# Altium PCB SkinHearing_electrodes.PcbDoc
Units mm, origin at the board's own origin, x right, y up, seen from the top; angles counter-clockwise.
Board outline 235.08 x 33.5 mm, 2 copper layers (Top Layer, Bottom Layer); 7 components, 25 nets, 92 pads, 0 vias.
Unrouted connection lines stored in the file: 6.
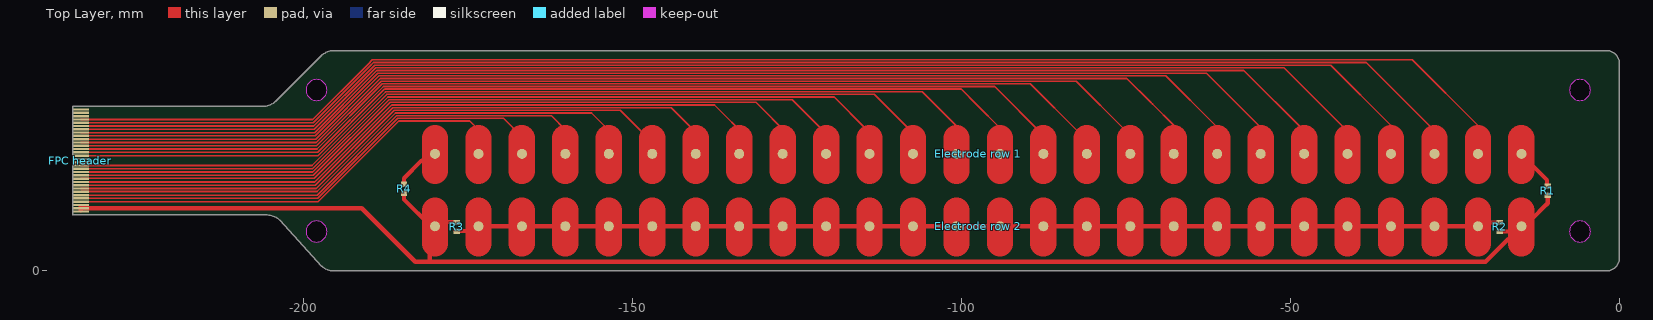
[diagram p0: Top Layer view]
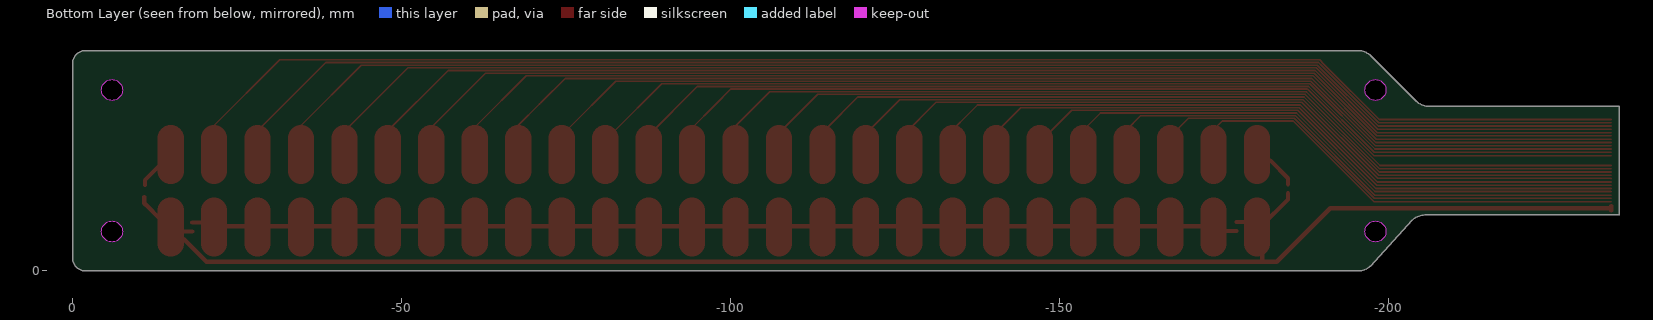
[diagram p1: Bottom Layer view, seen from below]
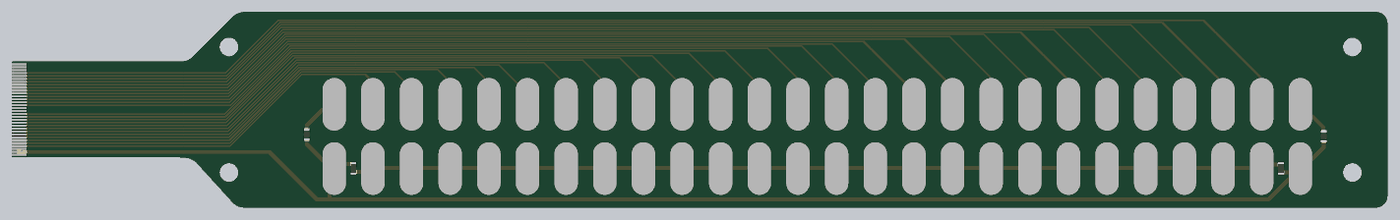
[diagram p2: 3D render of the assembled board from above, using the file's embedded part models]

## Layer stack, top to bottom
Top Solder: solder mask 0.0102, Solder Resist, Dk 3.5
Top Layer: signal copper 0.0356
Dielectric 1: dielectric 0.32, FR-4, Dk 4.8
Bottom Layer: signal copper 0.0356
Bottom Solder: solder mask 0.0102, Solder Resist, Dk 3.5

## Board outline
-234.98,8.516 -205.509,8.516 -205.509,8.52 cw(c-205.621,5.522) -203.6,7.739 -197.205,0.695 -197.209,0.7 ccw(c-195.28,2.998) -195.385,0 -2,0 ccw(c-2,2) 0,2 0,31.5 ccw(c-2,31.5) -2,33.5 -195.4,33.5 ccw(c-195.261,30.503) -197.302,32.702 -197.3,32.7 -204.2,25.8 -204.198,25.798 cw(c-206.239,27.997) -205.9,25.016 -234.98,25.016 ccw(c-234.98,24.916) -235.08,24.916 -235.08,8.616 ccw(c-234.98,8.616)
cut-out: -199.6,6 ccw(c-198,6) -198,4.4 ccw(c-198,6) -196.4,6 ccw(c-198,6) -198,7.6 ccw(c-198,6)
cut-out: -7.6,6 ccw(c-6,6) -6,4.4 ccw(c-6,6) -4.4,6 ccw(c-6,6) -6,7.6 ccw(c-6,6)
cut-out: -199.6,27.5 ccw(c-198,27.5) -198,25.9 ccw(c-198,27.5) -196.4,27.5 ccw(c-198,27.5) -198,29.1 ccw(c-198,27.5)
cut-out: -7.6,27.5 ccw(c-6,27.5) -6,25.9 ccw(c-6,27.5) -4.4,27.5 ccw(c-6,27.5) -6,29.1 ccw(c-6,27.5)

## Design rules (kind name [scope] priority, off if disabled: settings)
Clearance [All] p1: gap=0.15 ignorepadtopadclearanceinfootprint=FALSE except(0: Arc-Hole Track-Hole SMDPad-Hole THPad-Hole Via-Hole Fill-Hole Poly-Hole Region-Hole Text-Hole)
ComponentClearance [All] p1: gap=0 collisioncheckmode=3 verticalgap=0 showdistances=FALSE
PolygonConnect [All] p1: connectstyle=Relief reliefconductorwidth=0.254 reliefentries=4 polygonreliefangle="90 Angle" airgapwidth=0.254
RoutingVias [All] p1: holewidth=0.711 width=1.27 viastyle="Through Hole" minholewidth=0.711 minwidth=1.27 maxholewidth=0.711 maxwidth=1.27
SolderMaskExpansion [All] p1: expansion=0.102
Width [All] p1: maxlimit=5 minlimit=0.254 preferedwidth=0.254
29 further rules are at their usual default settings.

## Components (designator, comment, footprint, x,y, rotation, side; value= is the part's Value field where it differs from the comment)
"Electrode row 1" "Skinhearing_electrode_bar" "Skinhearing_electrode bar"#1 -180,17.8 r0 top
"Electrode row 2" "Skinhearing_electrode_bar" "Skinhearing_electrode bar"#2 -180,6.8 r0 top
"FPC header" "FPC_header_XF2M-3215-1A" FPC_XF2M-3215-1A -233.83,16.782 r90 top
R1 "R" R0603 -10.9,12.2 r90 top value=0R
R2 "R" R0603 -18.2,6.7 r90 top value=0R
R3 "R" R0603 -176.7,6.7 r90 top value=0R
R4 "R" R0603 -184.7,12.5 r90 top value=0R

## Footprints (in the part's own frame and the unit in brackets; to place one, negate y for a bottom-side part, rotate by r counter-clockwise, add the part's x,y. Pads: shape width x height; smd on the part's side, far side on the other; paste and mask are expansions set on the pad)
FPC_XF2M-3215-1A [mm] "FPC template for XF2M-3215-1A 32pin connector"
  rect 0.35x2.5 smd: 1(-7.75,0) 2(-7.25,0) 3(-6.75,0) 4(-6.25,0) 5(-5.75,0) 6(-5.25,0) 7(-4.75,0) 8(-4.25,0) 9(-3.75,0) 10(-3.25,0) 11(-2.75,0) 12(-2.25,0) 13(-1.75,0) 14(-1.25,0) 15(-0.75,0) 16(-0.25,0) 17(0.25,0) 18(0.75,0) 19(1.25,0) 20(1.75,0) 21(2.25,0) 22(2.75,0) 23(3.25,0) 24(3.75,0) 25(4.25,0) 26(4.75,0) 27(5.25,0) 28(5.75,0) 29(6.25,0) 30(6.75,0) 31(7.25,0) 32(7.75,0)
R0603 [mm]
  rect 0.8x0.95 smd: 1(-0.675,0) 2(0.675,0)
  body extent -0.87,-0.48 0.87,0.48, height 0.45
"Skinhearing_electrode bar"#1 [mil]
  round 60 smd: 1(0,0) 2(260,0) 3(520,0) 4(780,0) 5(1040,0) 6(1300,0) 7(1560,0) 8(1820,0) 9(2080,0) 10(2340,0) 11(2600,0) 12(2860,0) 13(3120,0) 14(3380,0) 15(3640,0) 16(3900,0) 17(4160,0) 18(4420,0) 19(4680,0) 20(4940,0) 21(5200,0) 22(5460,0) 23(5720,0) 24(5980,0) 25(6240,0) 26(6500,0)
  Top Layer lines w157.48: 0,-103 0,0 0,93.85 ; 260,-103 260,0 260,74.17 260,74.64 260,93.85 ; 520,-103 520,0 520,93.85 ; 780,-103 780,0 780,90.08 780,93.85 ; 1040,-103 1040,0 1040,93.85 ; 1300,-103 1300,0 1300,93.85 ; 1560,-103 1560,0 1560,93.85 ; 1820,-103 1820,0 1820,93.85 ; 2080,-103 2080,0 2080,93.85 ; 2340,-103 2340,0 2340,93.85 ; 2600,-103 2600,0 2600,93.85 ; 2860,-103 2860,0 2860,93.85 ; 3120,-103 3120,0 3120,93.85 ; 3380,-103 3380,0 3380,93.85 ; 3640,-103 3640,0 3640,93.85 ; 3900,-103 3900,0 3900,93.85 ; 4160,-103 4160,0 4160,93.85 ; 4420,-103 4420,0 4420,93.85 ; 4680,-103 4680,0 4680,93.85 ; 4940,-103 4940,0 4940,93.85 ; 5200,-103 5200,0 5200,93.85 ; 5460,-103 5460,0 5460,93.85 ; 5720,-103 5720,0 5720,79.21 5720,93.85 ; 5980,-103 5980,0 5980,86.93 5980,93.85 ; 6240,-103 6240,0 6240,93.85 ; 6500,-103 6500,-43.31 6500,0 6500,93.85
"Skinhearing_electrode bar"#2 [mil]
  round 60 smd: 1(0,0) 2(260,0) 3(520,0) 4(780,0) 5(1040,0) 6(1300,0) 7(1560,0) 8(1820,0) 9(2080,0) 10(2340,0) 11(2600,0) 12(2860,0) 13(3120,0) 14(3380,0) 15(3640,0) 16(3900,0) 17(4160,0) 18(4420,0) 19(4680,0) 20(4940,0) 21(5200,0) 22(5460,0) 23(5720,0) 24(5980,0) 25(6240,0) 26(6500,0)
  Top Layer lines w157.48: 0,-103 0,0 0,3.94 0,25.59 0,93.85 ; 260,-103 260,0 ; 260,93.85 260,0 ; 520,-103 520,0 ; 520,93.85 520,0 ; 780,-103 780,0 ; 780,93.85 780,0 ; 1040,-103 1040,0 ; 1040,93.85 1040,0 ; 1300,-103 1300,0 ; 1300,93.85 1300,0 ; 1560,-103 1560,0 ; 1560,93.85 1560,0 ; 1820,-103 1820,0 ; 1820,93.85 1820,0 ; 2080,-103 2080,0 ; 2080,93.85 2080,0 ; 2340,-103 2340,0 ; 2340,93.85 2340,0 ; 2600,-103 2600,0 ; 2600,93.85 2600,0 ; 2860,-103 2860,0 ; 2860,93.85 2860,0 ; 3120,-103 3120,0 ; 3120,93.85 3120,0 ; 3380,-103 3380,0 ; 3380,93.85 3380,0 ; 3640,-103 3640,0 ; 3640,93.85 3640,0 ; 3900,-103 3900,0 ; 3900,93.85 3900,0 ; 4160,-103 4160,0 ; 4160,93.85 4160,0 ; 4420,-103 4420,0 ; 4420,93.85 4420,0 ; 4680,-103 4680,0 ; 4680,93.85 4680,0 ; 4940,-103 4940,0 ; 4940,93.85 4940,0 ; 5200,-103 5200,0 ; 5200,93.85 5200,0 ; 5460,-103 5460,0 ; 5460,93.85 5460,0 ; 5720,-103 5720,0 ; 5720,93.85 5720,0 ; 5980,-103 5980,0 ; 5980,93.85 5980,0 ; 6240,-103 6240,0 6240,26.57 6240,93.85 ; 6500,-103 6500,-21.65 6500,0 6500,55.12 6500,93.85 ; 260,0 260,0 ; 520,0 520,0 ; 780,0 780,0 ; 1040,0 1040,0 ; 1300,0 1300,0 ; 1560,0 1560,0 ; 1820,0 1820,0 ; 2080,0 2080,0 ; 2340,0 2340,0 ; 2600,0 2600,0 ; 2860,0 2860,0 ; 3120,0 3120,0 ; 3380,0 3380,0 ; 3640,0 3640,0 ; 3900,0 3900,0 ; 4160,0 4160,0 ; 4420,0 4420,0 ; 4680,0 4680,0 ; 4940,0 4940,0 ; 5200,0 5200,0 ; 5460,0 5460,0 ; 5720,0 5720,0 ; 5980,0 5980,0

## Part data
R1 R2 R3 R4: "Resistor SMD"

## Nets (pads, with @x,y where several pads share a name; then routed paths per layer and width w, separated by ;. In a path a pad name is that pad's centre, name@x,y a point inside that pad or via, vN(x,y) a via of type N, cw(c..) or ccw(c..) an arc to the next point about the centre after c; other vN are vias at no path point)
CH1: "Electrode row 1.2" "FPC header.4" | length 69.7
  Top Layer w0.254: -233.83,10.532 -197.768,10.532 -185.504,22.796 -174.696,22.796 -173.396,21.496 -173.396,20.184 -173.396,19.696 -173.396,19.684 -173.396,17.8
CH2: "Electrode row 1.3" "FPC header.5" | length 75.8
  Top Layer w0.254: -233.83,11.032 -197.839,11.032 -185.671,23.2 -169.6,23.2 -166.792,20.392 -166.792,20.184 -166.792,17.8
CH3: "Electrode row 1.4" "FPC header.6" | length 81.9
  Top Layer w0.254: -233.83,11.532 -197.911,11.532 -185.839,23.604 -162.304,23.604 -160.188,21.488 -160.188,20.184 -160.188,20.088 -159.5,19.4
CH4: "Electrode row 1.5" "FPC header.7" | length 87.8
  Top Layer w0.254: -233.83,12.032 -233.782,12.08 -197.934,12.08 -186.006,24.008 -156.208,24.008 -152.55,20.35
CH5: "Electrode row 1.6" "FPC header.8" | length 92.6
  Top Layer w0.254: -233.83,12.532 -198.053,12.532 -186.173,24.412 -151.823,24.412 -147.822,20.411
CH6: "Electrode row 1.7" "FPC header.9" | length 100.2
  Top Layer w0.254: -233.83,13.032 -198.182,13.032 -186.398,24.816 -144.116,24.816 -141.281,21.981 -141.281,20.411
CH7: "Electrode row 1.8" "FPC header.10" | length 108.4
  Top Layer w0.254: -233.83,13.532 -198.253,13.532 -186.565,25.22 -137.52,25.22 -132.4,20.1
CH8: "Electrode row 1.9" "FPC header.11" | length 114.4
  Top Layer w0.254: -233.83,14.032 -233.782,14.08 -198.363,14.08 -186.819,25.624 -131.224,25.624 -126.3,20.7
CH9: "Electrode row 1.10" "FPC header.12" | length 120.6
  Top Layer w0.254: -233.83,14.532 -198.482,14.532 -186.986,26.028 -125.728,26.028 -120.25,20.55
CH10: "Electrode row 1.11" "FPC header.13" | length 126.1
  Top Layer w0.254: -233.83,15.032 -198.553,15.032 -187.153,26.432 -119.332,26.432 -114.45,21.55
CH11: "Electrode row 1.12" "FPC header.14" | length 132.7
  Top Layer w0.254: -233.83,15.532 -198.625,15.532 -187.357,26.8 -187.321,26.836 -113.236,26.836 -108,21.6
CH12: "Electrode row 1.13" "FPC header.15" | length 140
  Top Layer w0.254: -233.83,16.032 -198.697,16.032 -187.525,27.204 ; -187.524,27.204 -187.488,27.24 -105.94,27.24 -100.638,21.938
CH13: "Electrode row 1.14" "FPC header.18" | length 146.2
  Top Layer w0.254: -233.83,17.532 -218.201,17.532 -212.868,17.532 -197.768,17.532 -187.692,27.608 ; -187.691,27.608 -187.655,27.644 -100.044,27.644 -99.973,27.573 -97.656,25.256 -97.578,25.178 -94.218,21.818
CH14: "Electrode row 1.15" "FPC header.19" | length 153.5
  Top Layer w0.254: -233.83,18.032 -197.839,18.032 -187.823,28.048 -94.948,28.048 -87.544,20.644
CH15: "Electrode row 1.16" "FPC header.20" | length 159
  Top Layer w0.254: -233.83,18.532 -197.925,18.532 -188.005,28.452 -89.552,28.452 -82.059,20.959
CH16: "Electrode row 1.17" "FPC header.21" | length 165.9
  Top Layer w0.254: -233.83,19.032 -197.997,19.032 -188.173,28.856 -82.556,28.856 -75.057,21.357
CH17: "Electrode row 1.18" "FPC header.22" | length 173.1
  Top Layer w0.254: -233.83,19.532 -220.564,19.532 -216.568,19.532 -198.068,19.532 -188.34,29.26 -74.86,29.26 -71.24,25.64 -70.97,25.37 -67.738,22.138
CH18: "Electrode row 1.19" "FPC header.23" | length 179.7
  Top Layer w0.254: -233.83,20.032 -198.139,20.032 -188.507,29.664 -68.931,29.664 -61.3,22.033
CH19: "Electrode row 1.20" "FPC header.24" | length 186.3
  Top Layer w0.254: -233.83,20.532 -198.211,20.532 -189.087,29.655 -188.675,30.068 -62.768,30.068 -54.778,22.078
CH20: "Electrode row 1.21" "FPC header.25" | length 194.6
  Top Layer w0.254: -233.83,21.032 -198.282,21.032 -189.491,29.823 -188.842,30.472 -57.072,30.472 -47.75,21.15 -47.05,21.15
CH21: "Electrode row 1.22" "FPC header.26" | length 201.6
  Top Layer w0.254: -233.83,21.532 -198.353,21.532 -189.895,29.99 -189.009,30.876 -50.976,30.876 -41.1,21 -41.1,20.1
CH22: "Electrode row 1.23" "FPC header.27" | length 209.6
  Top Layer w0.254: -233.83,22.032 -198.425,22.032 -189.177,31.28 -43.88,31.28 -34.712,22.112 -34.712,20.184 -34.712,19.812 -34.35,19.45
CH23: "Electrode row 1.24" "FPC header.28" | length 215.7
  Top Layer w0.254: -233.83,22.532 -198.496,22.532 -189.757,31.271 -189.344,31.684 -38.484,31.684 -28.108,21.308 -28.108,20.184 -28.108,20.008 -27.7,19.6
CH24: "Electrode row 1.25" "FPC header.29" | length 222.4
  Top Layer w0.254: -233.83,23.032 -198.567,23.032 -190.161,31.439 -189.511,32.088 -31.488,32.088 -21.2,21.8 -21.2,20
GND: "Electrode row 1.1" "Electrode row 1.26" "Electrode row 2.1" "Electrode row 2.2" "Electrode row 2.3" "Electrode row 2.4" "Electrode row 2.5" "Electrode row 2.6" "Electrode row 2.7" "Electrode row 2.8" "Electrode row 2.9" "Electrode row 2.10" "Electrode row 2.11" "Electrode row 2.12" "Electrode row 2.13" "Electrode row 2.14" "Electrode row 2.15" "Electrode row 2.16" "Electrode row 2.17" "Electrode row 2.18" "Electrode row 2.19" "Electrode row 2.20" "Electrode row 2.21" "Electrode row 2.22" "Electrode row 2.23" "Electrode row 2.24" "Electrode row 2.25" "Electrode row 2.26" "FPC header.1" "FPC header.2" "FPC header.3" "FPC header.30" "FPC header.31" "FPC header.32" R1.1 R1.2 R2.1 R2.2 R3.1 R3.2 R4.1 R4.2 | length 420.9
  Top Layer w0.254: -233.83,9.89 -233.83,10.032 ; -173.996,6.304 -173.804,6.496 -173.804,6.8
  Top Layer w0.635: -233.83,9.2 -233.83,9.532 ; -233.83,9.89 -233.83,9.532 ; R4.1 -184.7,10.873 -180.727,6.9 ; R4.2 -184.7,14.1 -182.02,16.78 ; -179.5,6.9 -180,6.9 -180.727,6.9 ; R3.1@-176.9,6.1 -174.2,6.1 -173.996,6.304 ; R3.2@-176.9,7.45 -180,7.45 -180.177,7.45 -180.727,6.9 ; -173.804,6.8 -173.396,6.8 -166.792,6.8 -160.188,6.8 -153.584,6.8 -146.98,6.8 -140.376,6.8 -133.772,6.8 -127.168,6.8 -120.564,6.8 -113.96,6.8 -107.356,6.8 -100.752,6.8 -94.148,6.8 -87.544,6.8 -80.94,6.8 -74.336,6.8 -67.732,6.8 -61.128,6.8 -54.524,6.8 -47.92,6.8 -41.316,6.8 -34.712,6.8 -28.108,6.8 -24.037,6.8 -21.504,6.8 ; -21.504,7.475 -21.404,7.375 R2.2 ; -20.2,6.125 -20,6.125 ; R2.1 -15.125,6.025 -14.9,6.25 ; -16.897,4.838 -20.335,1.4 -180.8,1.4 ; -16.2,6.9 -15.6,7.5 -15.5,7.6 -15,8.1 -14.9,8.2 -13,8.2 -11.5,9.7 -10.9,10.3 R1.1@-10.9,11.238 ; -14.9,16.7 -13.9,16.7 -11,13.8 R1.2@-11,13.075 ; -233.83,9.532 -191.132,9.532 -183,1.4 -180.8,1.4 ; -180.8,1.4 -180.8,6.827 -180.727,6.9
pads on no net: "FPC header.16" "FPC header.17"

## Silkscreen, mask and mechanical layers (free items; w line width, h text height)
Mechanical 1:
  circle w0.127: c-198,6 r1.6
  circle w0.127: c-198,27.5 r1.6
  circle w0.127: c-6,27.5 r1.6
  circle w0.127: c-6,6 r1.6
  pour cut-out: -199.6,27.5 ccw(c-198,27.5) -198,25.9 ccw(c-198,27.5) -196.4,27.5 ccw(c-198,27.5) -198,29.1 ccw(c-198,27.5)
  lines w0.127: -205.509,8.516 -234.98,8.516 cw(c-234.98,8.616) -235.08,8.616 -235.08,24.916 cw(c-234.98,24.916) -234.98,25.016 -226,25.016 -205.9,25.016 ccw(c-206.239,27.997) -204.198,25.798 ; -205.509,8.52 cw(c-205.621,5.522) -203.6,7.739 -197.205,0.695 ; -204.2,25.8 -197.3,32.7 ; -197.302,32.702 cw(c-195.261,30.503) -195.4,33.5 -2,33.5 cw(c-2,31.5) 0,31.5 0,2 cw(c-2,2) -2,0 -195.385,0 cw(c-195.28,2.998) -197.209,0.7